# Altium PCB PCB1.PcbDoc
Units mil, origin at the board's own origin, x right, y up, seen from the top; angles counter-clockwise.
Board outline 1265.03 x 330.03 mil, 2 copper layers (Top Layer, Bottom Layer); 8 components, 6 nets, 35 pads, 3 vias.
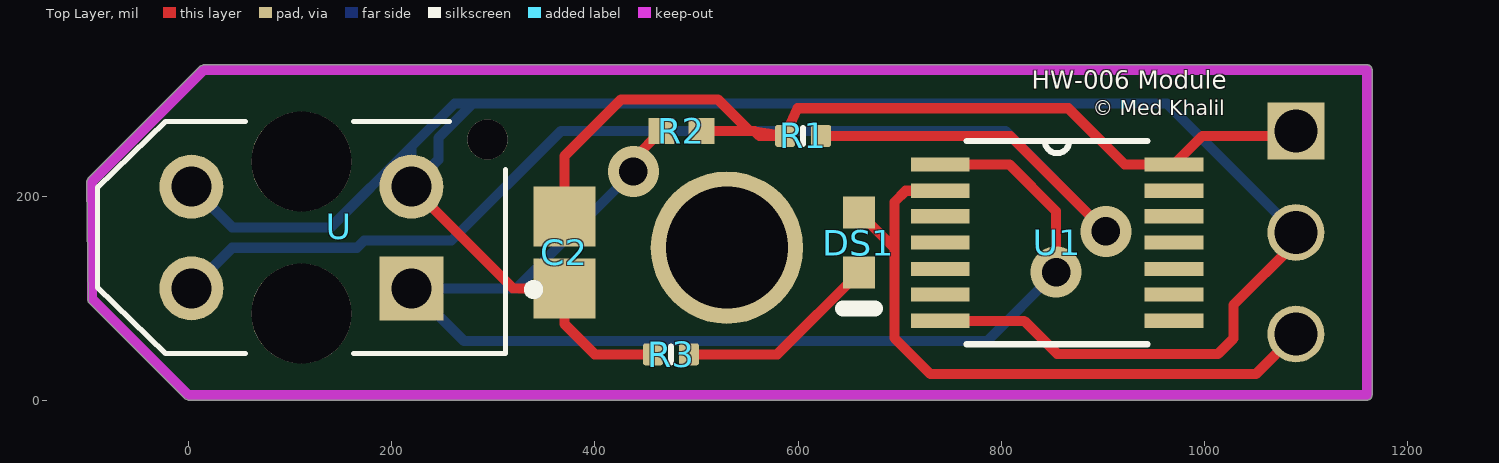
[diagram p0: Top Layer view]
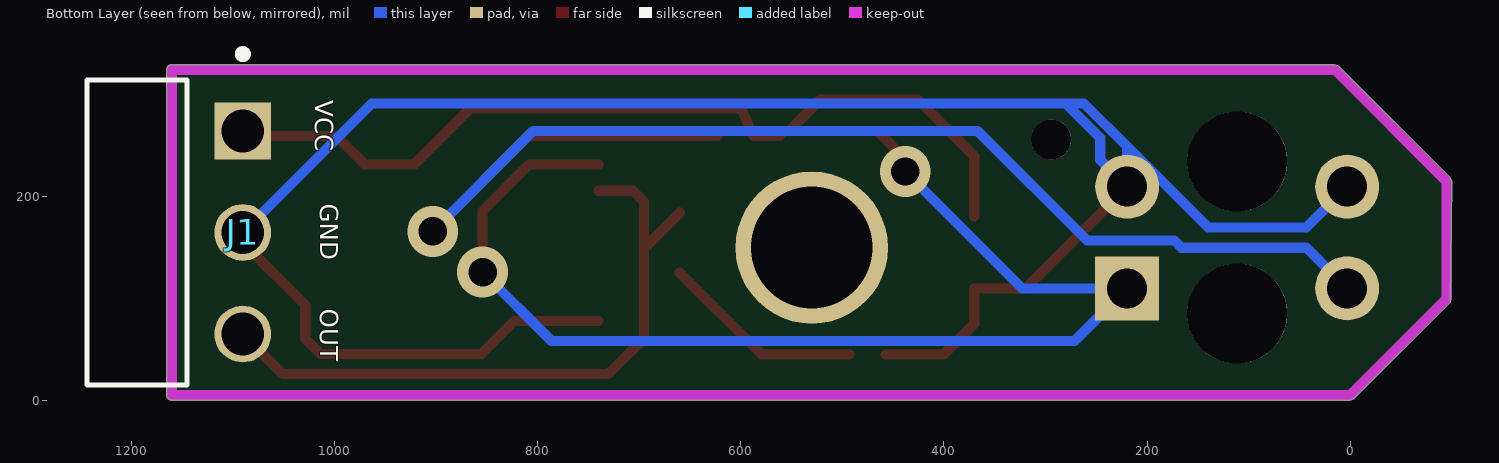
[diagram p1: Bottom Layer view, seen from below]
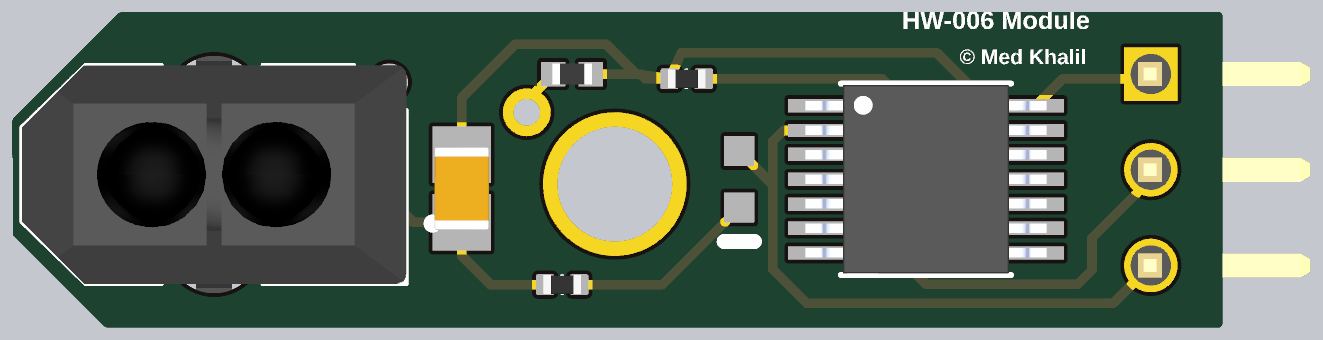
[diagram p2: 3D render of the assembled board from above, using the file's embedded part models]

## Layer stack, top to bottom
Top Solder: solder mask 0.4, Solder Resist, Dk 3.5
Top Layer: signal copper 1.4
Dielectric 1: dielectric 12.6, FR-4, Dk 4.8
Bottom Layer: signal copper 1.4
Bottom Solder: solder mask 0.4, Solder Resist, Dk 3.5

## Board outline
-98.55,96.45 -3.55,1.45 0,-0.02 1160,-0.02 ccw(c1160,5) 1165.02,5 1165.02,325 ccw(c1160,325) 1160,330.01 15,330.01 11.45,328.55 -98.55,218.55 -100.02,215

## Design rules (kind name [scope] priority, off if disabled: settings)
Clearance [All] p1: gap=10 ignorepadtopadclearanceinfootprint=FALSE
PolygonConnect [All] p1: connectstyle=Relief reliefconductorwidth=10 reliefentries=4 polygonreliefangle="90 Angle" airgapwidth=10
RoutingVias [All] p1: holewidth=28 width=50 viastyle="Through Hole" minholewidth=28 minwidth=50 maxholewidth=28 maxwidth=50
SolderMaskExpansion [All] p1: expansion=4 istentingtop=FALSE
SupplyNets "Schematic Supply Nets_1" [InNet('GND')] p1: voltage=0.000
SupplyNets "Schematic Supply Nets" [InNet('VCC')] p2: voltage=0.000
Width [All] p1: maxlimit=10 minlimit=10 preferedwidth=10
30 further rules are at their usual default settings.

## Components (designator, comment, footprint, x,y, rotation, side; value= is the part's Value field where it differs from the comment)
C2 "Capacitor 1 uF +/- 10% 25 V 0805" CAPC2013X145X50ML20T25 370,145.43 r90 top value=1µF
DS1 "HSMG-C190" AVAG-HSMX-C190_V 660,155 r270 top
J1 "THS-03-R-RAF" VALCON_THS-03-R-RAF 1090,165 r90 bottom
R1 "Resistor 100R +/-1 % 0402 63 mW" RESC0402(1005)_L 605,260 r0 top value=100
R2 "Resistor 100k +/-1% 0402 63 mW" RESC1005X40X25ML05T05 485.31,265 r0 top value=100k
R3 "Resistor 2K +/-5 % 0402 63 mW" RESC0402(1005)_L 475,45 r0 top value=2k
U "TCRT5000L" XDCR_TCRT5000L 111.27,160 r180 top
U1 "74HC14PW,112" SOP65P640X110-14N 855,155 r0 top

## Footprints (in the part's own frame and the unit in brackets; to place one, negate y for a bottom-side part, rotate by r counter-clockwise, add the part's x,y. Pads: shape width x height; smd on the part's side, far side on the other; paste and mask are expansions set on the pad)
AVAG-HSMX-C190_V [mm] "SMD, 2-Leads, Body 1.6x0.8mm, Height 0.9mm"
  rect 0.8x0.8 smd: 1(-0.75,0) 2(0.75,0)
  silkscreen extent 1.65,-0.4 1.65,0.4, body extent -0.8,-0.4 0.8,0.4, height 0.9
CAPC2013X145X50ML20T25 [mm] "Chip Capacitor, 2-Leads, Body 2.2x1.45mm, IPC Low Density"
  rect 1.5x1.55 smd: 1(-0.9,0) 2(0.9,0)
  body extent -1.1,-0.72 1.1,0.73, height 1.45
RESC0402(1005)_L [mm] "Chip Resistor, Body 1.0x0.5mm, IPC High Density"
  rrect25% 0.5x0.55 smd: 1(-0.45,0) 2(0.45,0)
  silkscreen extent 0,-0.2 0,0.2, body extent -0.5,-0.25 0.5,0.25, height 0.3
RESC1005X40X25ML05T05 [mm] "Chip Resistor, 2-Leads, Body 1.05x0.55mm, IPC Low Density"
  rect 0.65x0.65 smd: 1(-0.5,0) 2(0.5,0)
  body extent -0.53,-0.28 0.53,0.28, height 0.4
SOP65P640X110-14N [mil]
  rect 58x14 smd: 1(-115,77) 2(-115,51) 3(-115,26) 4(-115,0) 5(-115,-26) 6(-115,-51) 7(-115,-77) 8(115,-77) 9(115,-51) 10(115,-26) 11(115,0) 12(115,26) 13(115,51) 14(115,77)
  silkscreen extent -89,-100 89,100, body extent -126,-98 126,98, height 38
VALCON_THS-03-R-RAF [mm]
  rect 1.42x1.42 hole 1.07: 01(2.54,0)
  round 1.42 hole 1.07: 02(0,0) 03(-2.54,0)
  silkscreen extent -3.81,-0.1 4.56,3.9, body extent -3.81,-1.27 3.81,4.23, height 4.23
XDCR_TCRT5000L [mm]
  rect 1.6x1.6 hole 1: 1(-2.75,1.27)
  round 1.6 hole 1: 2(-2.75,-1.27) 3(2.75,-1.27) 4(2.75,1.27)
  round 1 hole 1 unplated: ""(-4.65,-2.45)
  round 2.5 hole 2.5 unplated: ""(0,1.9) ""(0,-1.9)
  silkscreen extent -5.92,-2.9 5.1,2.9, body extent -5.1,-3.5 5.1,3.5, height 6.71

## Part data
C2: library part CMP-001-00010-6, "Chip Capacitor, 1 uF, +/-10%, 25 V, 0805 (2012 Metric)", Capacitor Type=Ceramic, Case/Package=0805, Max Operating Temperature=125°C, Min Operating Temperature=-55°C, Tolerance=10%, Voltage Rating=25V, Mounting Technology=SM, Pins=2, RoHS Compliant=True
DS1: library part CMP-007-00013-2, "LED Uni-Color Green, 52 mW, 20 mA, -40 to 85 degC, 2-Pin SMD, RoHS, Tape and Reel", Case/Package=0603, Colour=Green, Forward Current=20mA, Forward Voltage=2.2V, Manufacturer=Avago, Max Operating Temperature=85°C, Min Operating Temperature=-40°C, Package Description="2-Pin Surface Mount Device, Body 1.6 x 0.8 mm, Height 0.9 mm", Package Quantity=4000, Package Reference=HSMX-C190, Power=52mW, Datasheet URL=http://docs.avagotech.com/docs/AV02-0551EN, Datasheet Version=Mar-12, Illumination Colour=Green, Lens Style=Diffused, Luminous Intensity=15mcd, Manufacturer URL=http://www.avagotech.com/, Mounting Technology=SM, Nominal Vf=2.2V, Packaging=TapeandReel, Pins=2, RoHS Compliant=True, Viewing Angle=170degrees
J1: Package=None, Availability=Unavailable, MP=THS-03-R-RAF, Price=None
R1: library part CMP-009-00167-3, "Chip Resistor, 100 Ohms, +/-1 %, 63 mW, -55 to 155 degC, 0402", Case/Package=0402, Max Operating Temperature=155°C, Min Operating Temperature=-55°C, Power=63mW, Tolerance=1%, Pins=2
R2: library part CMP-009-00021-5, "Chip Resistor, 100 KOhm, +/- 1%, 0.063 W, -55 to 155 degC, 0402 (1005 Metric)", Case/Package=0402, Max Operating Temperature=155°C, Min Operating Temperature=-55°C, Power=63mW, Tolerance=1%, Voltage Rating=50V, Mounting Technology=SM, Pins=2, RoHS Compliant=True
R3: library part CMP-009-00138-3, "Chip Resistor, 2 kOhms, +/-5 %, 63 mW, -55 to 155 degC, 0402", Case/Package=0402, Max Operating Temperature=155°C, Min Operating Temperature=-55°C, Power=63mW, Tolerance=5%, Pins=2
U: "Reflective Optical Sensor 0.591 _15mm_ PCB Mount", Package="PCB Mount Vishay Semiconductor", Availability=Unavailable, MF=Vishay, MP=TCRT5000L, Price=None, SnapEDA_Link=https://www.snapeda.com/parts/TCRT5000L/Vishay%20Semiconductor%20Opto%20Division/view-part/229608/?ref=snap
U1: "Inverter IC 6 Channel Schmitt Trigger 14-TSSOP", Package="TSSOP14-14 Nexperia USA Inc.", Availability=Good, Check_prices=https://www.snapeda.com/parts/74HC14PW,112/Nexperia/view-part/1039907/?ref=eda, MF=Nexperia, MP=74HC14PW,112, Price=None, Purchase-URL=https://pricing.snapeda.com/search/part/74HC14PW,112/?ref=eda, SnapEDA_Link=https://www.snapeda.com/parts/74HC14PW,112/Nexperia/view-part/1039907/?ref=snap

## Free pads (board coordinates)
  round 150 hole 120: 12(530,150)

## Via types
v1: diameter 50, hole 28, Top Layer to Bottom Layer, 3 vias

## Nets (pads, with @x,y where several pads share a name; then routed paths per layer and width w, separated by ;. In a path a pad name is that pad's centre, name@x,y a point inside that pad or via, vN(x,y) a via of type N, cw(c..) or ccw(c..) an arc to the next point about the centre after c; other vN are vias at no path point)
A1: R2.1 U1.1 U.1 | length 1194.8
  Top Layer w10: v1(438,225) 438,237.37 R2.1 ; U1.1 808,232 854,186 v1(854,126)
  Bottom Layer w10: v1(438,225) 323,110 U.1 271.54,58 786,58 v1(854,126)
D1: DS1.1 J1.03 U1.2 | length 659.1
  Top Layer w10: DS1.1 695,149.53 ; U1.2 706,206 695,195 695,149.53 ; J1.03 1050.52,25.52 730.48,25.52 695,61 695,149.53
GND: C2.1 J1.02 R3.1 U1.7 U.2 U.3 | length 2118
  Top Layer w10: U.2 319.54,110 C2.1 370,75 400,45 R3.1 ; U1.7 822.52,78 855,45.52 1013.52,45.52 1028.52,60.52 1028.52,93.52 J1.02@1090,155
  Bottom Layer w10: U.3 43,170 140,170 219.54,249.54 ; J1.02@1090,155 J1.02 963,292 280,292 ; 219.54,249.54 262,292 280,292 ; 219.54,249.54 U.2 246,236.46 246,258 280,292
NetDS1_2: DS1.2 R3.2 | length 200.6
  Top Layer w10: R3.2 579.53,45 DS1.2
NetR1_2: R1.2 U.4 | length 1324.4
  Top Layer w10: R1.2 809,260 v1(903,166)
  Bottom Layer w10: U.4 43,150 166,150 173,157 259,157 367,265 804,265 v1(903,166)
VCC: C2.2 J1.01 R1.1 R2.2 U1.14 | length 957
  Top Layer w10: C2.2 370,240 426,296 521,296 552,265 ; R2.2 552,265 ; J1.01 1090,260 998,260 U1.14 921.28,232 866,287.28 599.57,287.28 R1.1 ; 552,265 557,265 557.83,264.17 ; 552,265 557.83,264.17 ; 557.83,264.17 562,260 R1.1 ; 557.83,264.17 R1.1
pads on no net: U1.3 U1.4 U1.5 U1.6 U1.8 U1.9 U1.10 U1.11 U1.12 U1.13 U.

## Keep-outs
Keep-Out Layer:
  lines w10: 327.5,325 882.5,325 1160,325 1160,261.25 1160,63.75 1160,5 0,5 -95,100 -95,215 15,325 437.5,325

## Silkscreen, mask and mechanical layers (free items; w line width, h text height)
Top Overlay:
  text "HW-006 Module" at 830,300.72 h30
  text "© Med Khalil" at 890,275.39 h25
Bottom Overlay:
  text "VCC" at 1024.67,294.97 h30 r90
  text "GND" at 1019.67,193.34 h30 r90
  text "OUT" at 1019.67,90 h30 r90